# EAGLE board Anouchka_unrouted (EAGLE 7.1.0)
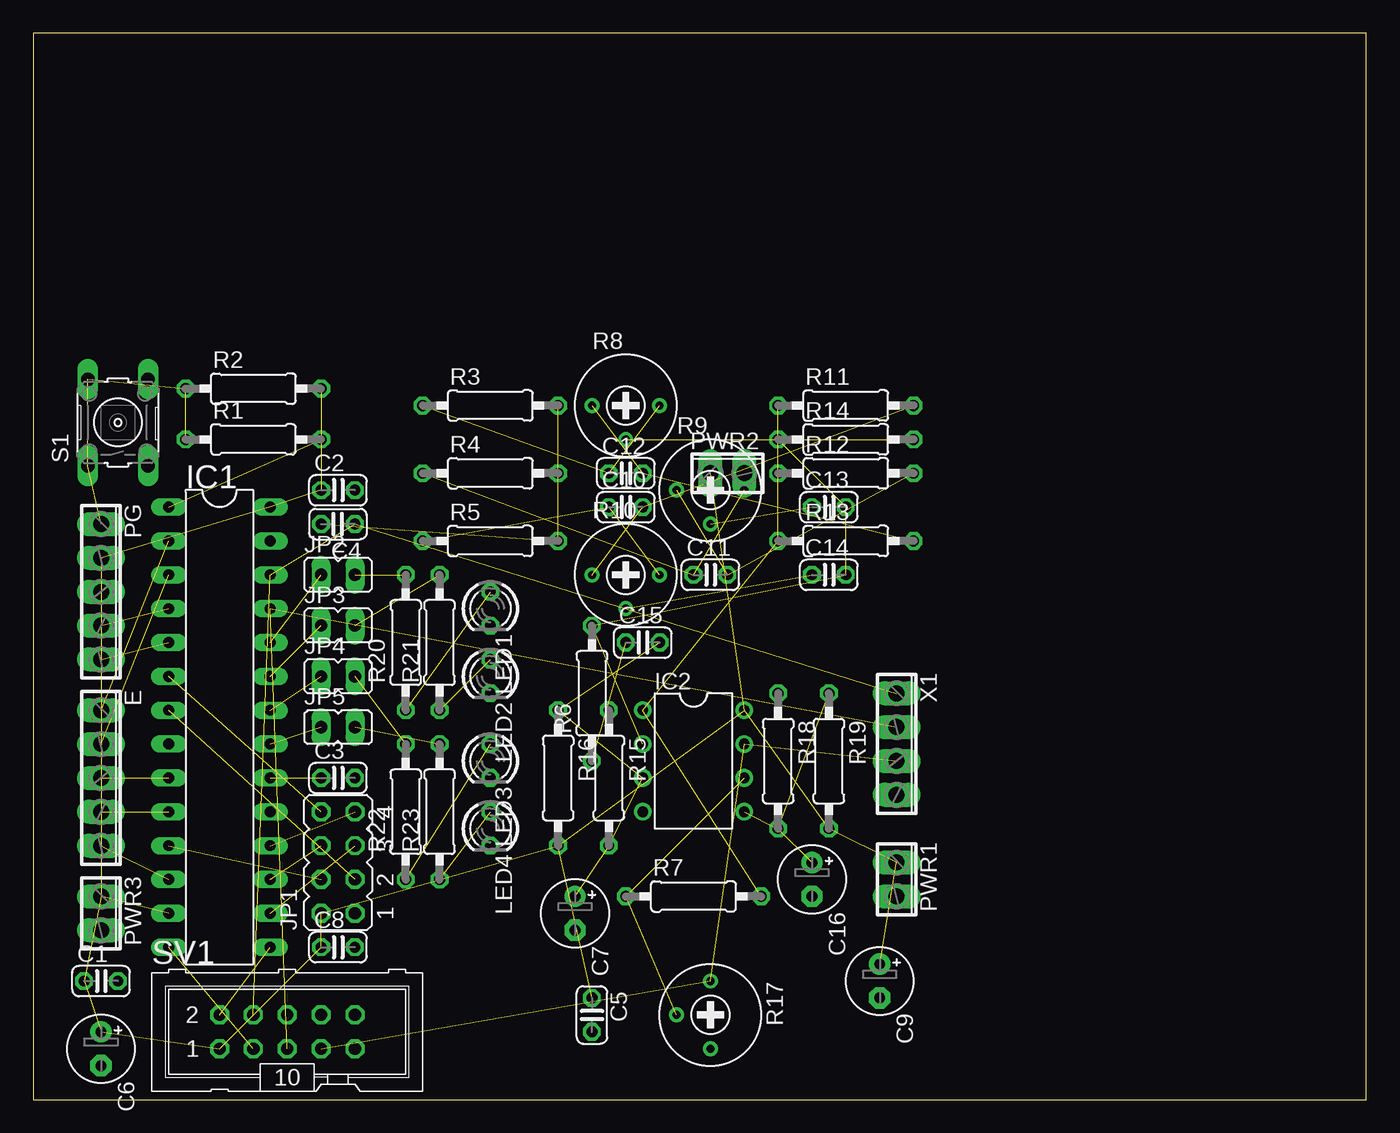
[diagram p0: board, top side]
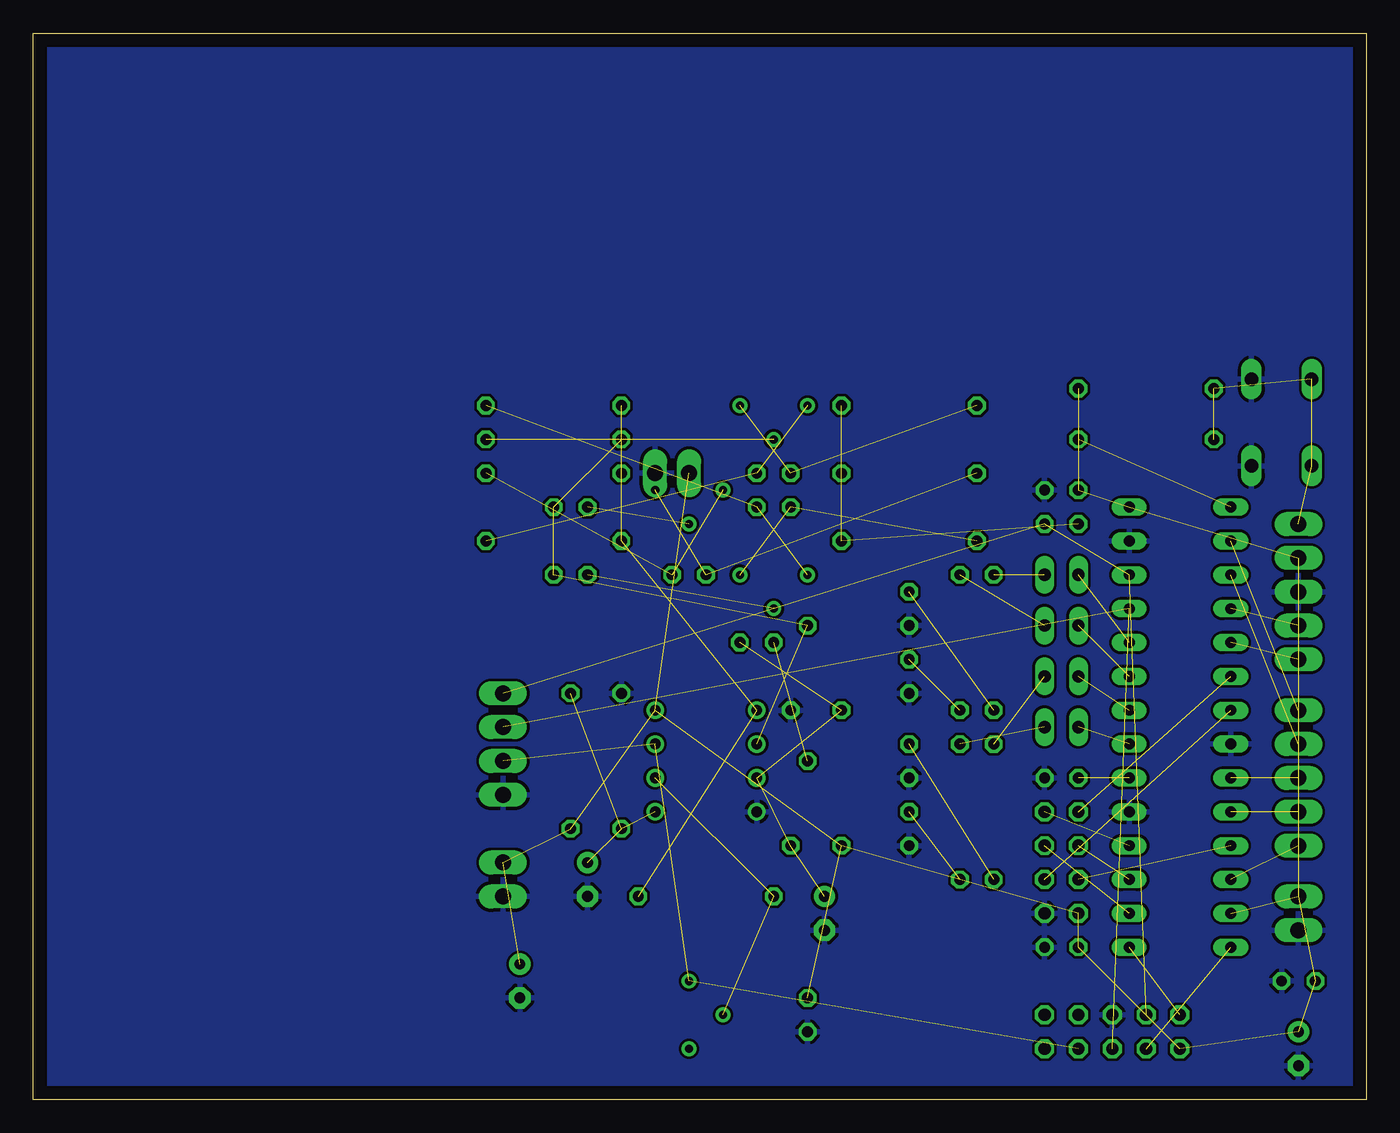
[diagram p1: board, bottom side, seen from below]

Size 100 x 80 mm. Coordinates in mm from the lower left corner, seen from the top.
Outline: 0,0 100,0 100,80 0,80 0,0
Copper layers (1*16): Top 0.035mm / dielectric 1.5mm / Bottom 0.035mm
Design rules "default": minimum track width 10mil, minimum drill 24mil, track to track 8mil, track to pad 8mil, pad to pad 8mil, via to via 8mil, smd to smd 8mil, copper to edge 40mil, drill to drill 8mil, minimum pad ring 10mil, minimum via ring 8mil, stop-mask expansion 4mil, vias tented up to drill 0mil, thermal gap 10mil

## Footprints (pad centres in the part's own frame; a part is rotated, then mirrored left to right if it is on the bottom)
C025-024X044 = drill 0.813 octagon: 1 -1.27,0; 2 1.27,0
E2,5-5 = drill 0.813 pad 1.6: + -1.27,0 | drill 0.813 pad 1.6 octagon: - 1.27,0
5POL254 = drill 1.2 long: 1 -5.08,0; 2 -2.54,0; 3 0,0; 4 2.54,0; 5 5.08,0
DIL28-3 = drill 0.813 long: 1 -16.51,-3.81; 2 -13.97,-3.81; 3 -11.43,-3.81; 4 -8.89,-3.81; 5 -6.35,-3.81; 6 -3.81,-3.81; 7 -1.27,-3.81; 8 1.27,-3.81; 9 3.81,-3.81; 10 6.35,-3.81; 11 8.89,-3.81; 12 11.43,-3.81; 13 13.97,-3.81; 14 16.51,-3.81; 15 16.51,3.81; 16 13.97,3.81; 17 11.43,3.81; 18 8.89,3.81; 19 6.35,3.81; 20 3.81,3.81; 21 1.27,3.81; 22 -1.27,3.81; 23 -3.81,3.81; 24 -6.35,3.81; 25 -8.89,3.81; 26 -11.43,3.81; 27 -13.97,3.81; 28 -16.51,3.81
DIL08 = drill 0.813 pad 1.27: 1 -3.81,-3.81; 2 -1.27,-3.81; 3 1.27,-3.81; 4 3.81,-3.81; 5 3.81,3.81; 6 1.27,3.81; 7 -1.27,3.81; 8 -3.81,3.81
JP4Q = drill 0.914 octagon: 1 -3.81,-1.27; 2 -3.81,1.27; 3 -1.27,-1.27; 4 -1.27,1.27; 5 1.27,-1.27; 6 1.27,1.27; 7 3.81,-1.27; 8 3.81,1.27
JP1 = drill 0.914 long: 1 0,-1.27; 2 0,1.27
LED3MM = drill 0.813 octagon: A -1.27,0; K 1.27,0
2POL254 = drill 1.2 long: 1 -1.27,0; 2 1.27,0
0207/10 = drill 0.813 octagon: 1 -5.08,0; 2 5.08,0
RTRIM3339P = drill 0.61: 1 -2.54,0; 2 0,-2.54; 3 2.54,0
B3F-10XX = drill 1.016 long: 1 -3.251,2.261; 2 3.251,2.261; 3 -3.251,-2.261; 4 3.251,-2.261
ML10 = drill 0.914 octagon: 1 -5.08,-1.27; 2 -5.08,1.27; 3 -2.54,-1.27; 4 -2.54,1.27; 5 0,-1.27; 6 0,1.27; 7 2.54,-1.27; 8 2.54,1.27; 9 5.08,-1.27; 10 5.08,1.27
4POL254 = drill 1.2 long: 1 -3.81,0; 2 -1.27,0; 3 1.27,0; 4 3.81,0

## Placement (x,y rotation side)
C1  0.1u  [C025-024X044]  5.08,8.89 0 top
C2  0.1u  [C025-024X044]  22.86,45.72 0 top
C3  10u  [C025-024X044]  22.86,24.13 0 top
C4  0.1u  [C025-024X044]  22.86,43.18 180 top
C5  100n  [C025-024X044]  41.91,6.35 270 top
C6  10u  [E2,5-5]  5.08,3.81 270 top
C7  10u  [E2,5-5]  40.64,13.97 270 top
C8  0.1u  [C025-024X044]  22.86,11.43 0 top
C9  10u  [E2,5-5]  63.5,8.89 270 top
C10  [C025-024X044]  44.45,44.45 0 top
C11  [C025-024X044]  50.8,39.37 0 top
C12  [C025-024X044]  44.45,46.99 0 top
C13  22n  [C025-024X044]  59.69,44.45 0 top
C14  4.7n  [C025-024X044]  59.69,39.37 0 top
C15  1n  [C025-024X044]  45.72,34.29 0 top
C16  10u  [E2,5-5]  58.42,16.51 270 top
E  [5POL254]  5.08,24.13 270 top
IC1  DSPIC33FJXXXGP802TH  [DIL28-3]  13.97,27.94 270 top
IC2  TL072P  [DIL08]  49.53,25.4 270 top
JP1  [JP4Q]  22.86,17.78 90 top
JP2  [JP1]  22.86,39.37 270 top
JP3  [JP1]  22.86,35.56 270 top
JP4  [JP1]  22.86,31.75 270 top
JP5  [JP1]  22.86,27.94 270 top
LED1  [LED3MM]  34.29,36.83 270 top
LED2  [LED3MM]  34.29,31.75 270 top
LED3  [LED3MM]  34.29,25.4 270 top
LED4  [LED3MM]  34.29,20.32 270 top
PG  [5POL254]  5.08,38.1 270 top
PWR1  [2POL254]  64.77,16.51 270 top
PWR2  [2POL254]  52.07,46.99 0 top
PWR3  [2POL254]  5.08,13.97 270 top
R1  220  [0207/10]  16.51,49.53 0 top
R2  10k  [0207/10]  16.51,53.34 0 top
R3  10k  [0207/10]  34.29,52.07 0 top
R4  3.3k  [0207/10]  34.29,46.99 0 top
R5  1.8k  [0207/10]  34.29,41.91 0 top
R6  270  [0207/10]  41.91,30.48 90 top
R7  100k  [0207/10]  49.53,15.24 0 top
R8  100k  [RTRIM3339P]  44.45,52.07 0 top
R9  100k  [RTRIM3339P]  50.8,45.72 0 top
R10  470k  [RTRIM3339P]  44.45,39.37 0 top
R11  1.8k  [0207/10]  60.96,52.07 0 top
R12  3.3k  [0207/10]  60.96,46.99 0 top
R13  10k  [0207/10]  60.96,41.91 0 top
R14  10k  [0207/10]  60.96,49.53 0 top
R15  10k  [0207/10]  43.18,24.13 270 top
R16  10k  [0207/10]  39.37,24.13 270 top
R17  470k  [RTRIM3339P]  50.8,6.35 270 top
R18  10k  [0207/10]  55.88,25.4 270 top
R19  10k  [0207/10]  59.69,25.4 270 top
R20  300  [0207/10]  27.94,34.29 90 top
R21  300  [0207/10]  30.48,34.29 90 top
R22  300  [0207/10]  27.94,21.59 90 top
R23  300  [0207/10]  30.48,21.59 90 top
S1  [B3F-10XX]  6.35,50.8 90 top
SV1  [ML10]  19.05,5.08 0 top
X1  [4POL254]  64.77,26.67 270 top

## Library data of the parts
C1-C16 R1-R23 = rcl
E PG PWR1-PWR3 X1 = con-phoenix-254; OC_FARNELL: unknown; OC_NEWARK: unknown
IC1 = microchip-dspic33
IC2 = linear
JP1-JP5 = jumper
LED1-LED4 = led
S1 = switch-omron; MPN: B3F-1000; OC_FARNELL: 176432; OC_NEWARK: 36M3542
SV1 = con-ml; OC_FARNELL: unknown; OC_NEWARK: unknown

## Nets
CE: IC1.7 JP1.3
CSN: IC1.11 JP1.4
GND: C1.2 C2.2 C3.2 C5.2 C6.- C7.- C8.2 C9.- C16.- IC1.8 IC1.19 IC1.27 IC2.4 JP1.1 LED1.K LED2.K LED3.K LED4.K PG.3 PWR1.2 PWR2.2 PWR3.2 R15.1 R18.1 S1.3 S1.4 SV1.6 X1.4
IRQ: IC1.6 JP1.8
LED1: IC1.24 JP2.1
LED2: IC1.23 JP3.1
LED3: IC1.22 JP4.1
LED4: IC1.21 JP5.1
MISO: IC1.18 JP1.7
MOSI: IC1.17 JP1.6
N$1: IC1.1 R1.2
N$2: PG.1 R1.1 R2.1 S1.1 S1.2
N$3: C3.1 IC1.20
N$4: IC2.1 R7.2 R11.1 R12.1 R13.1
N$5: C4.2 R3.2 R4.2 R5.2
N$6: C12.1 R3.1 R8.3
N$7: C12.2 R8.1 R13.2
N$8: C11.1 R4.1 R9.3
N$9: C11.2 R9.1 R12.2
N$10: C10.1 R5.1 R10.3
N$11: C10.2 R10.1 R11.2
N$12: C14.1 R10.2
N$13: C13.1 R9.2
N$14: R8.2 R14.2
N$15: C13.2 C14.2 IC2.2 R6.2 R14.1
N$16: C15.1 R6.1
N$17: IC2.6 R7.1 R17.2
N$18: C7.+ C15.2 IC2.3 R15.2 R16.1
N$20: C16.+ IC2.5 R18.2 R19.1
N$21: IC1.15 SV1.2
N$22: IC1.14 SV1.3
N$23: JP2.2 R20.2
N$26: SV1.8
N$27: SV1.9
N$28: JP3.2 R21.2
N$29: JP4.2 R22.2
N$30: JP5.2 R23.2
N$31: LED1.A R20.1
N$32: LED2.A R21.1
N$33: LED3.A R22.1
N$34: LED4.A R23.1
N$35: SV1.10
OUT1: C4.1 IC1.26 SV1.4 X1.1
OUT2: IC1.25 SV1.5 X1.2
OUT3: IC2.7 R17.1 SV1.7 X1.3
PGC: IC1.5 PG.5
PGD: IC1.4 PG.4
RA0: E.1 IC1.2
RA1: E.2 IC1.3
RA2: E.3 IC1.9
RA3: E.4 IC1.10
RA4: E.5 IC1.12
SCK: IC1.16 JP1.5
VDD: C1.1 C2.1 C5.1 C6.+ C8.1 C9.+ IC1.13 IC1.28 IC2.8 JP1.2 PG.2 PWR1.1 PWR2.1 PWR3.1 R2.2 R16.2 R19.2 SV1.1

## Tracks (layer width: path | path; a pad name or v marks a point on that pad's centre or on a via)
CE  (1 unrouted)
CSN  (1 unrouted)
GND
  pour Bottom: 1.27,80.01 99.06,80.01 99.06,0 0,0 0,80.01
IRQ  (1 unrouted)
LED1  (1 unrouted)
LED2  (1 unrouted)
LED3  (1 unrouted)
LED4  (1 unrouted)
MISO  (1 unrouted)
MOSI  (1 unrouted)
N$1  (1 unrouted)
N$2  (4 unrouted)
N$3  (1 unrouted)
N$4  (4 unrouted)
N$5  (3 unrouted)
N$6  (2 unrouted)
N$7  (2 unrouted)
N$8  (2 unrouted)
N$9  (2 unrouted)
N$10  (2 unrouted)
N$11  (2 unrouted)
N$12  (1 unrouted)
N$13  (1 unrouted)
N$14  (1 unrouted)
N$15  (4 unrouted)
N$16  (1 unrouted)
N$17  (2 unrouted)
N$18  (4 unrouted)
N$20  (3 unrouted)
N$21  (1 unrouted)
N$22  (1 unrouted)
N$23  (1 unrouted)
N$28  (1 unrouted)
N$29  (1 unrouted)
N$30  (1 unrouted)
N$31  (1 unrouted)
N$32  (1 unrouted)
N$33  (1 unrouted)
N$34  (1 unrouted)
OUT1  (3 unrouted)
OUT2  (2 unrouted)
OUT3  (3 unrouted)
PGC  (1 unrouted)
PGD  (1 unrouted)
RA0  (1 unrouted)
RA1  (1 unrouted)
RA2  (1 unrouted)
RA3  (1 unrouted)
RA4  (1 unrouted)
SCK  (1 unrouted)
VDD  (17 unrouted)